# Altium PCB PCB.PcbDoc
Units mm, origin at the board's own origin, x right, y up, seen from the top; angles counter-clockwise.
Board outline 56.52 x 41.27 mm, 2 copper layers (Top Layer, Bottom Layer); 18 components, 12 nets, 61 pads, 0 vias.
Unrouted connection lines stored in the file: 2.
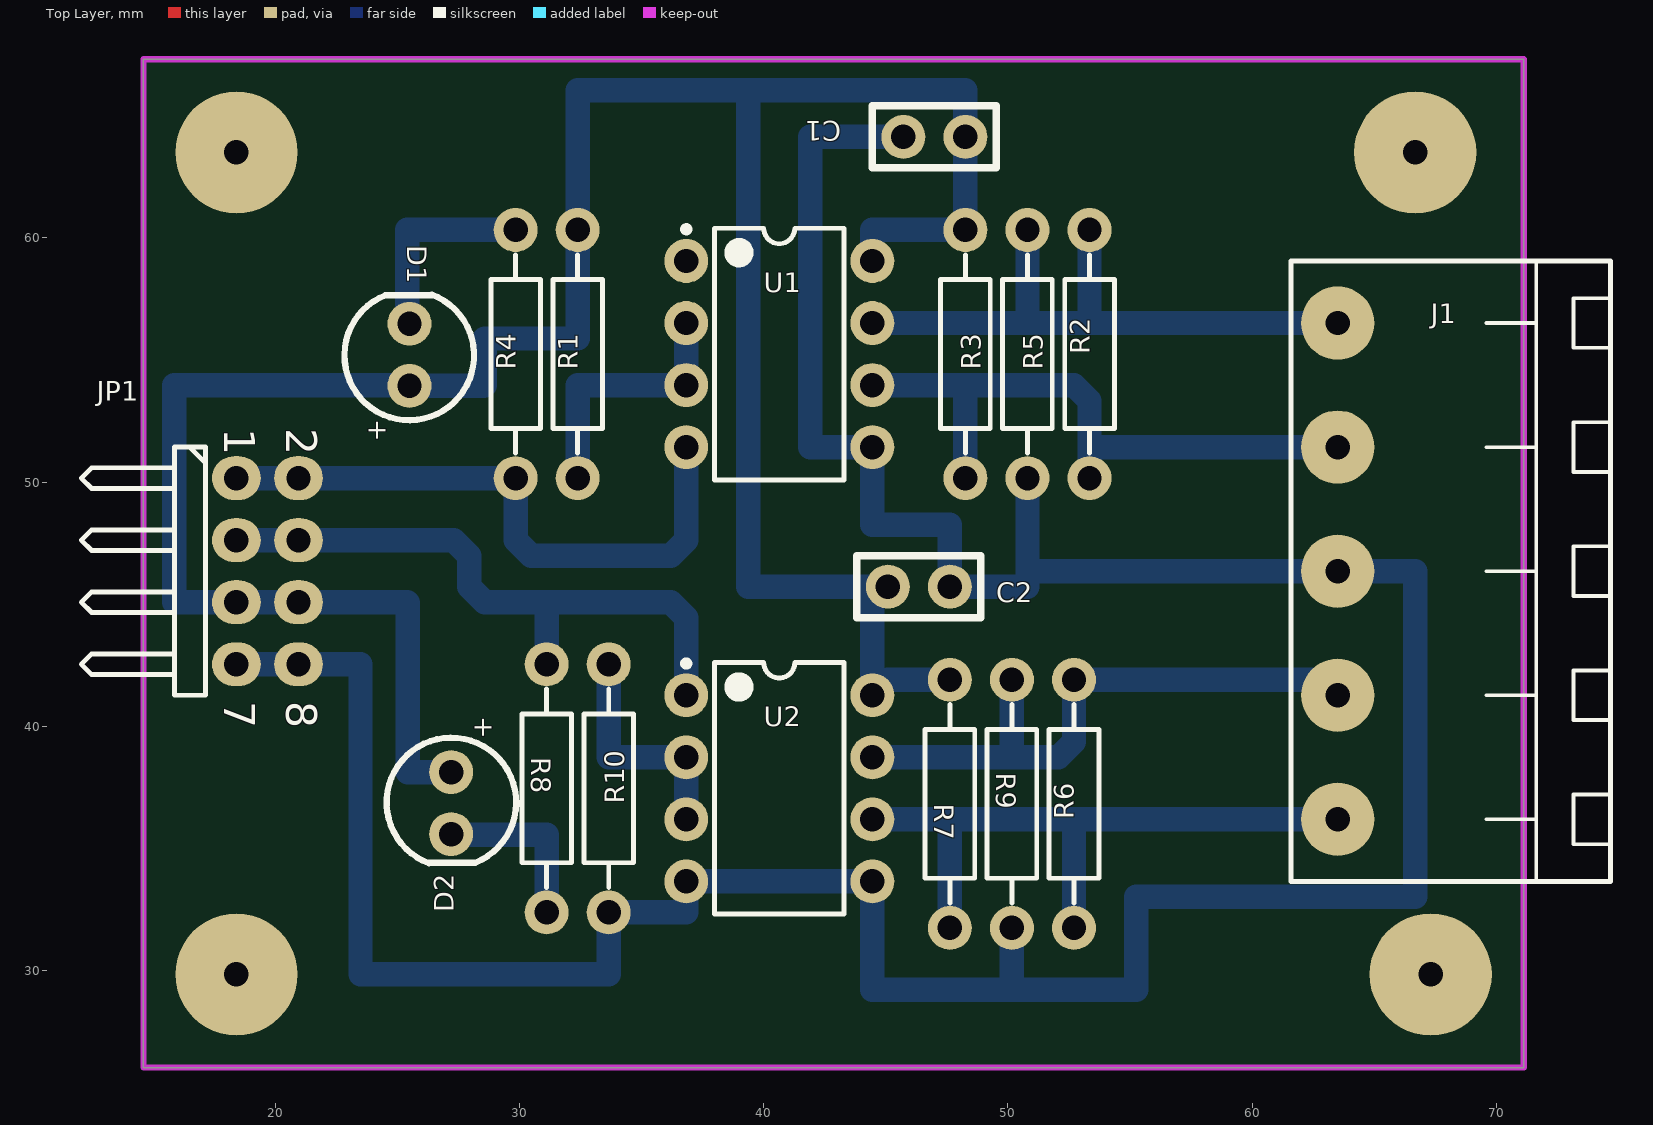
[diagram p0: Top Layer view]
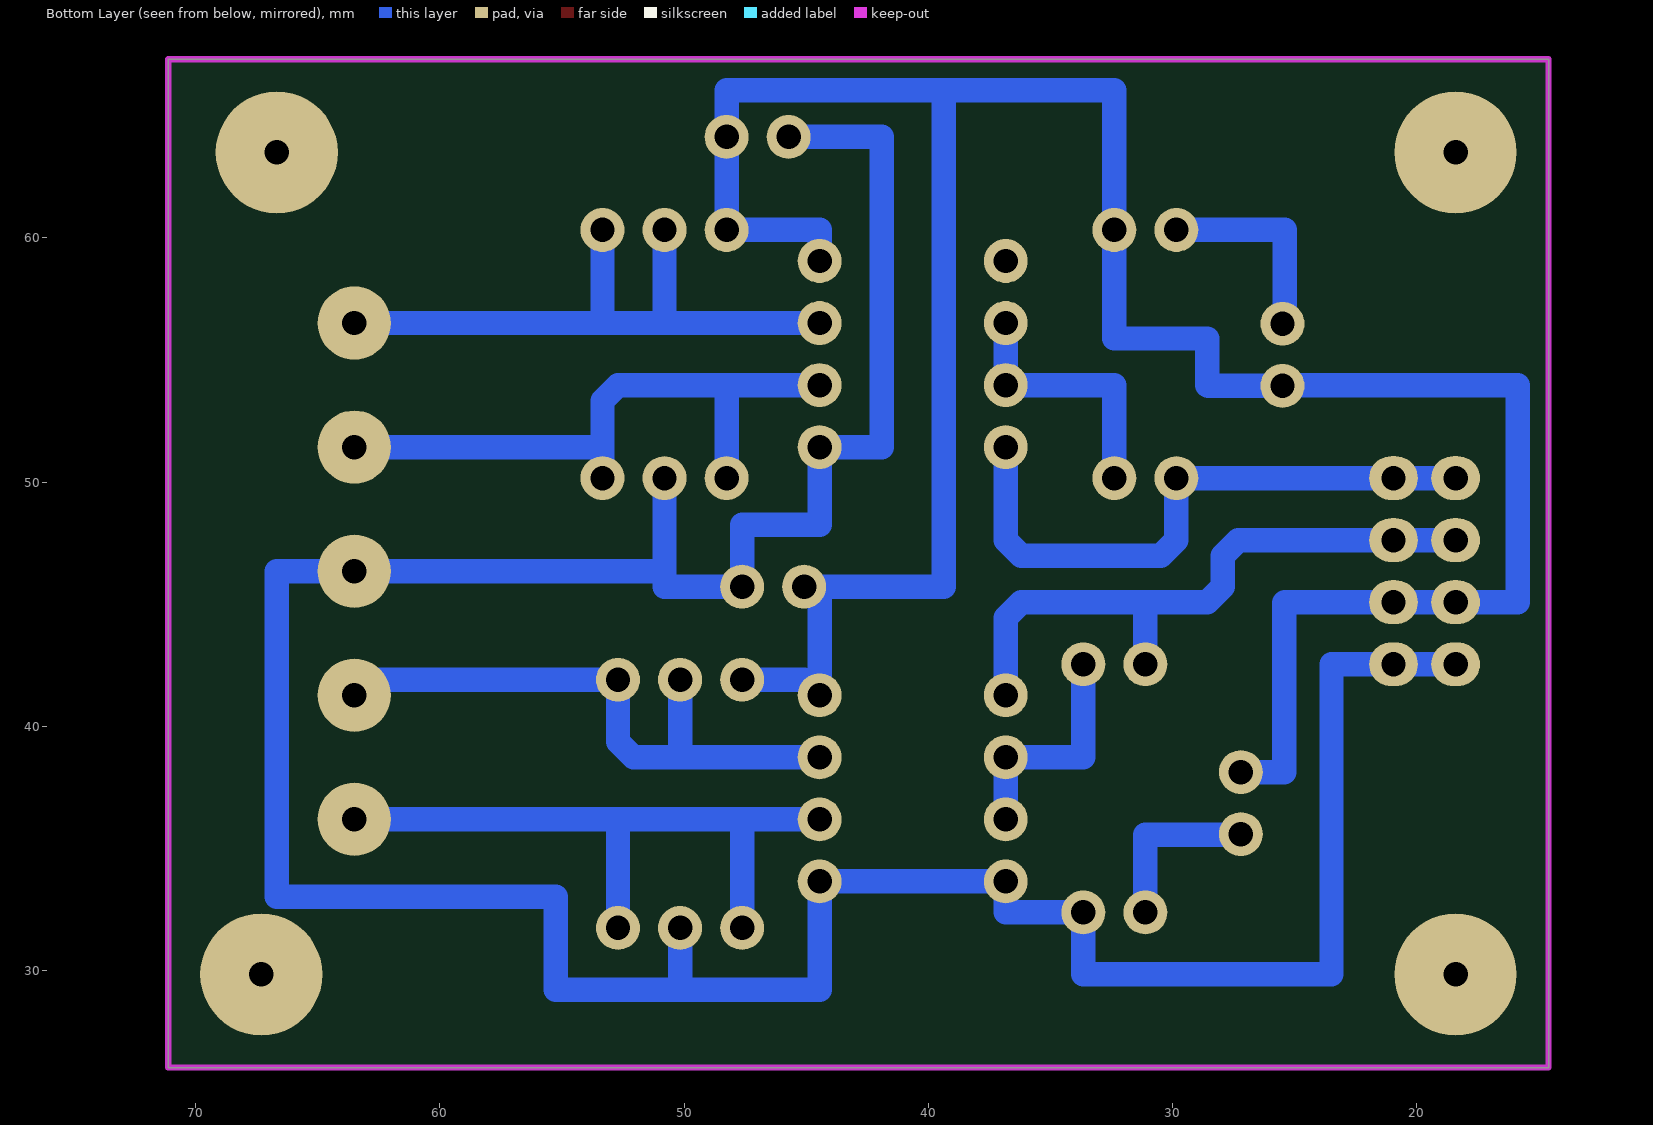
[diagram p1: Bottom Layer view, seen from below]

## Layer stack, top to bottom
Top Solder: solder mask 0.0102, Solder Resist, Dk 3.5
Top Layer: signal copper 0.0356
Dielectric 1: dielectric 0.32, FR-4, Dk 4.8
Bottom Layer: signal copper 0.0356
Bottom Solder: solder mask 0.0102, Solder Resist, Dk 3.5

## Board outline
14.605,26.035 71.12,26.035 71.12,67.31 14.605,67.31

## Design rules (kind name [scope] priority, off if disabled: settings)
Clearance [All] p1: gap=0.6
ComponentClearance [All] p1 off: gap=0 collisioncheckmode=3 verticalgap=0 showdistances=FALSE
Height [All] p1: minheight=0 maxheight=50 prefheight=12.7
PolygonConnect [All] p1: connectstyle=Relief reliefconductorwidth=0.254 reliefentries=4 polygonreliefangle="90 Angle" airgapwidth=0.254
RoutingVias [All] p1: holewidth=0.711 width=1.27 viastyle="Through Hole" minholewidth=0.711 minwidth=1.27 maxholewidth=0.711 maxwidth=1.27
SolderMaskExpansion [All] p1: expansion=0.102
Width [All] p1: maxlimit=0.5 minlimit=0.5 preferedwidth=0.5
28 further rules are at their usual default settings.

## Components (designator, comment, footprint, x,y, rotation, side; value= is the part's Value field where it differs from the comment)
C1 "100nF" RAD0.1 46.99,64.135 r0 top
C2 "100nF" RAD0.1 46.355,45.72 r180 top
D1 "LED_Yellow" LED-5mm_Red 25.4,55.245 r90 top
D2 "LED_Yellow" LED-5mm_Red 27.305,36.83 r270 top
J1 "Header 5" Fonics_5PIN_1 63.5,46.355 r90 top
JP1 "Header 4X2H" HDR2X4H 18.415,50.165 r270 top
R1 "10K" AXIAL-0.4 32.385,55.245 r90 top
R2 "120" AXIAL-0.4 53.34,55.245 r90 top
R3 "1K" AXIAL-0.4 48.26,55.245 r270 top
R4 "470" AXIAL-0.4 29.845,55.245 r90 top
R5 "1K" AXIAL-0.4 50.8,55.245 r270 top
R6 "120" AXIAL-0.4 52.705,36.83 r90 top
R7 "1K" AXIAL-0.4 47.625,36.83 r270 top
R8 "470" AXIAL-0.4 31.115,37.465 r270 top
R9 "1K" AXIAL-0.4 50.165,36.83 r270 top
R10 "10K" AXIAL-0.4 33.655,37.465 r90 top
U1 "MAX485" PA8 40.64,55.245 r0 top
U2 "MAX485" PA8 40.64,37.465 r0 top

## Footprints (in the part's own frame and the unit in brackets; to place one, negate y for a bottom-side part, rotate by r counter-clockwise, add the part's x,y. Pads: shape width x height; smd on the part's side, far side on the other; paste and mask are expansions set on the pad)
AXIAL-0.4 [mm] "Axial Device, Thru-Hole; 2 Leads; 0.4 in Pin Spacing"
  round 1.8 hole 1: 1(-5.08,0) 2(5.08,0)
  silkscreen extent -4.06,-1.02 4.06,1.02
Fonics_5PIN_1 [mm]
  round 3 hole 1: 1(-10.16,0) 2(-5.08,0) 3(0,0) 4(5.08,0) 5(10.16,0)
  silkscreen extent -12.7,-11.18 12.7,1.91
HDR2X4H [mm] "Connector; Header; 4x2 Position; Right Angle"
  oval 1.8x2 hole 1: 1(0,0) 2(0,2.54) 3(2.54,0) 4(2.54,2.54) 5(5.08,0) 6(5.08,2.54) 7(7.62,0) 8(7.62,2.54)
  silkscreen extent -1.27,-6.35 8.89,-1.27
LED-5mm_Red [mm]
  round 1.8 hole 1: 1(-1.3,-0.1) 2(1.24,-0.1)
  silkscreen extent -2.71,-2.74 2.43,2.56, body extent -2.6,-2.64 2.48,2.46, height 9.6
PA8 [mm] "DIP, 8-Leads, Row Spacing 7.62mm, Pitch 2.54mm, Body 9.38x7.24mm"
  round 1.8 hole 1: 1(-3.81,3.81) 2(-3.81,1.27) 3(-3.81,-1.27) 4(-3.81,-3.81) 5(3.81,-3.81) 6(3.81,-1.27) 7(3.81,1.27) 8(3.81,3.81)
  silkscreen extent -3.93,-5.15 2.65,5.23, body extent -3.6,-5.15 3.6,5.15, height 4.58
RAD0.1 [mm]
  round 1.8 hole 1: 1(-1.27,0) 2(1.27,0)
  silkscreen extent -2.54,-1.27 2.54,1.27

## Part data
C1 C2: library part Cap, "Capacitor"
D1 D2: library part LED, "Typical INFRARED GaAs LED"
J1: "Header, 5-Pin"
JP1: "Header, 4-Pin, Dual row,  Right Angle"
R1 R2 R3 R4 R5 R6 R7 R8 R9 R10: library part Res1, "Resistor"
U1 U2: library part MAX485CPA, "Low-Power, Slew-Rate-Limited RS-485/RS-422 Transceiver"

## Free pads (board coordinates)
  round 5 hole 1: 0(18.415,29.845) 0(18.415,63.5) 0(66.675,63.5) 0(67.31,29.845)

## Nets (pads, with @x,y where several pads share a name; then routed paths per layer and width w, separated by ;. In a path a pad name is that pad's centre, name@x,y a point inside that pad or via, vN(x,y) a via of type N, cw(c..) or ccw(c..) an arc to the next point about the centre after c; other vN are vias at no path point)
GND: C1.1 C2.1 J1.3 JP1.7 JP1.8 pad.0@18.415,29.845 pad.0@67.31,29.845 R5.2 R9.2 R10.1 U1.5 U2.4 U2.5 | length 140.3
  Bottom Layer w1: JP1.7 JP1.8 23.495,42.545 23.495,29.845 33.655,29.845 R10.1 36.83,32.385 U2.4 U2.5 44.45,29.21 50.165,29.21 ; C1.1 41.91,64.135 41.91,51.435 U1.5 44.45,48.26 47.625,48.26 C2.1 50.8,45.72 50.8,46.355 ; R9.2 50.165,29.21 ; R5.2 50.8,46.355 ; 50.165,29.21 55.245,29.21 55.245,33.02 66.675,33.02 66.675,46.355 J1.3 50.8,46.355
NetD1_2: D1.2 R4.2 | length 8.4
  Bottom Layer w1: D1.2 25.47,56.515 25.4,56.515 25.4,60.325 R4.2 R4.2@29.875,60.355
NetD2_2: D2.2 R8.2 | length 7.1
  Bottom Layer w1: D2.2 27.235,35.56 31.115,35.56 R8.2 R8.2@31.145,32.355
NetJ1_1: J1.1 R6.1 R7.2 U2.6 | length 27.9
  Bottom Layer w1: U2.6 47.625,36.195 ; R7.2 47.625,36.195 ; R6.1 52.705,36.195 ; J1.1 52.705,36.195 ; 47.625,36.195 52.705,36.195
NetJ1_2: J1.2 R6.2 R9.1 U2.7 | length 25.3
  Bottom Layer w1: U2.7 50.165,38.735 ; R9.1 50.165,38.735 ; J1.2 62.865,41.91 R6.2 52.705,39.37 52.07,38.735 50.165,38.735
NetJ1_4: J1.4 R2.1 R3.2 U1.6 | length 26.3
  Bottom Layer w1: U1.6 48.26,53.975 ; R3.2 48.26,53.975 ; R2.1 53.34,51.435 ; J1.4 53.34,51.435 ; 48.26,53.975 52.705,53.975 53.34,53.34 53.34,51.435
NetJ1_5: J1.5 R2.2 R5.1 U1.7 | length 26.7
  Bottom Layer w1: U1.7 50.8,56.515 ; R5.1 50.8,56.515 ; R2.2 53.34,56.515 ; J1.5 53.34,56.515 ; 50.8,56.515 53.34,56.515
NetR1_1: R1.1 U1.2 U1.3 | length 10.8
  Bottom Layer w1: R1.1 32.385,53.975 U1.3 U1.2
NetR10_2: R10.2 U2.2 U2.3 | length 9.5
  Bottom Layer w1: R10.2 33.655,38.735 U2.2 U2.3
RX: JP1.1 JP1.2 R4.1 U1.4 | length 25.3
  Bottom Layer w1: JP1.1 JP1.2 R4.1 29.845,47.625 30.48,46.99 36.195,46.99 36.83,47.625 U1.4
TX: JP1.3 JP1.4 R8.1 U2.1 | length 26.2
  Bottom Layer w1: JP1.3 JP1.4 27.305,47.625 27.94,46.99 27.94,45.72 28.575,45.085 31.115,45.085 ; R8.1 31.115,45.085 ; U2.1 36.83,44.45 36.195,45.085 31.115,45.085
VCC: C1.2 C2.2 D1.1 D2.1 JP1.5 JP1.6 R1.2 R3.1 R7.1 U1.8 U2.8 | length 116.3
  Bottom Layer w1: D2.1 25.43,38.13 25.43,45.055 25.4,45.085 JP1.6 JP1.5 15.875,45.085 15.875,53.975 25.47,53.975 D1.1 28.545,53.945 28.575,53.975 28.575,55.88 32.385,55.88 R1.2 32.385,64.205 ; 32.385,64.265 32.385,66.04 39.37,66.04 ; U1.8 44.45,60.325 R3.1 C1.2 48.26,66.04 39.37,66.04 ; C2.2 C2.2@44.45,45.72 ; R7.1 45.085,41.91 U2.8 C2.2@44.45,45.72 ; 39.37,66.04 39.37,45.72 C2.2@44.45,45.72
pads on no net: U1.1

## Keep-outs
Keep-Out Layer:
  the board outline again, w0.254

## Text inside footprints (layer, text, board x,y; h text height)
D1: Top Overlay "+" at 24.535,51.659 h0.8 r90
D2: Top Overlay "+" at 28.17,40.416 h0.8 r270
JP1: Top Overlay "2" at 20.447,52.197 h1.27 r270; Top Overlay "1" at 17.907,52.197 h1.27 r270; Top Overlay "7" at 17.907,41.021 h1.27 r270; Top Overlay "8" at 20.447,41.021 h1.27 r270